# Altium PCB PCB1.PcbDoc
Units mm, origin at the board's own origin, x right, y up, seen from the top; angles counter-clockwise.
Board outline 75.82 x 34.16 mm, 2 copper layers (Top Layer, Bottom Layer); 18 components, 31 nets, 101 pads, 30 vias.
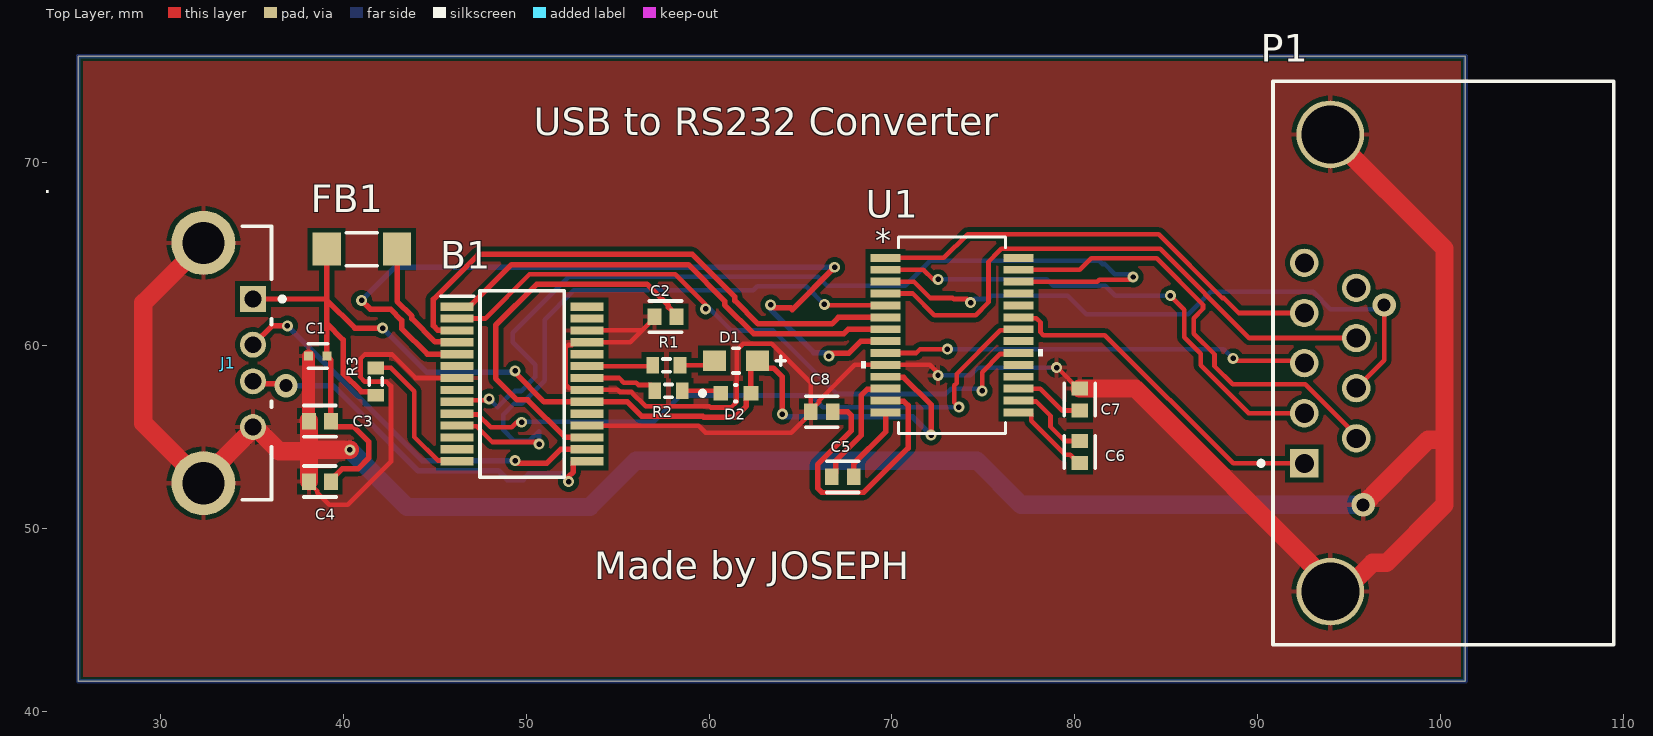
[diagram p0: Top Layer view]
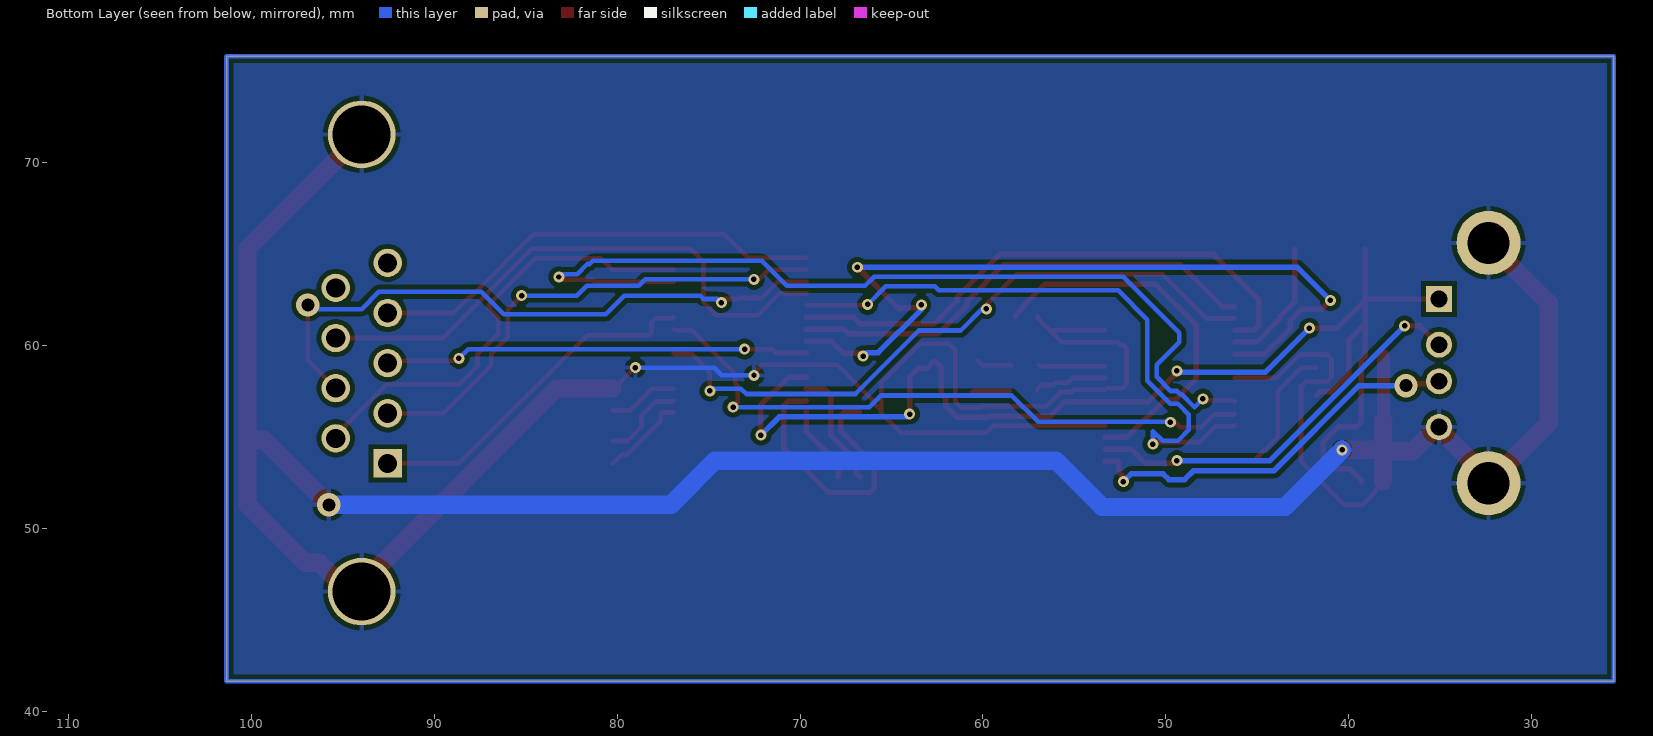
[diagram p1: Bottom Layer view, seen from below]
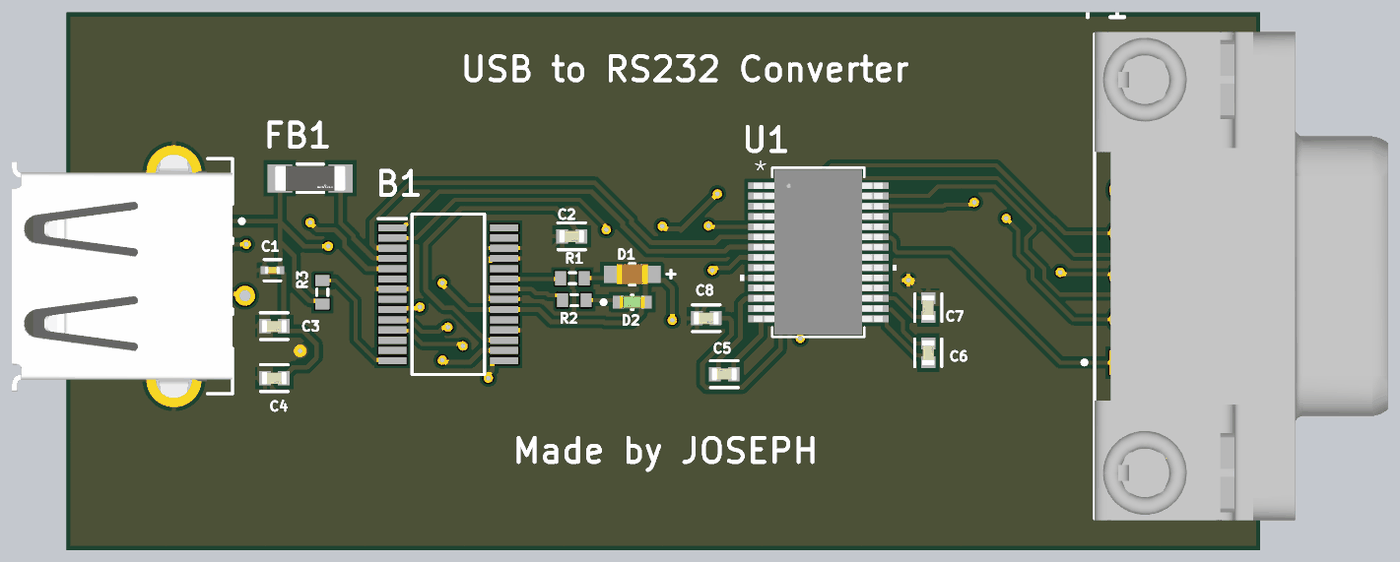
[diagram p2: 3D render of the assembled board from above, using the file's embedded part models]

## Layer stack, top to bottom
Top Solder: solder mask 0.0102, Solder Resist, Dk 3.5
Top Layer: signal copper 0.0356
Dielectric 1: dielectric 0.32, FR-4, Dk 4.8
Bottom Layer: signal copper 0.0356
Bottom Solder: solder mask 0.0102, Solder Resist, Dk 3.5

## Board outline
25.527,41.656 25.527,75.819 101.346,75.819 101.346,41.656

## Design rules (kind name [scope] priority, off if disabled: settings)
BoardOutlineClearance [All] p1: gap=0.254 ignorepadtopadclearanceinfootprint=FALSE
Clearance [All] p1: gap=0.254 ignorepadtopadclearanceinfootprint=FALSE except(0: Arc-Hole Track-Hole SMDPad-Hole THPad-Hole Via-Hole Fill-Hole Poly-Hole Region-Hole Text-Hole; 0.15: Arc-SMDPad Track-SMDPad SMDPad-SMDPad)
HoleToHoleClearance [All] p1: gap=0.15 allowstackedmicrovias=TRUE
MinimumSolderMaskSliver [All] p1: minsoldermaskwidth=0.15
PolygonConnect [All] p1: connectstyle=Relief reliefconductorwidth=0.254 reliefentries=4 polygonreliefangle="90 Angle" airgapwidth=0.254
RoutingVias [All] p1: holewidth=0.711 width=1.27 viastyle="Through Hole" minholewidth=0.711 minwidth=1.27 maxholewidth=0.711 maxwidth=1.27
SilkToSilkClearance [All] p1: silktosilkclearance=0.15
SilkToSolderMaskClearance [IsPad] p1: minsilkscreentomaskgap=0.1 clearancetoexposedcopper=TRUE
SolderMaskExpansion [All] p1: expansion=0.102 istentingtop=FALSE
Width [InNet('VCC')] p1: maxlimit=0.3 minlimit=0.2 preferedwidth=0.25
Width Width_1 [InNet('GND')] p2: maxlimit=1 minlimit=0.254 preferedwidth=0.7
26 further rules are at their usual default settings.

## Components (designator, comment, footprint, x,y, rotation, side; value= is the part's Value field where it differs from the comment)
B1 "FT232RL-REEL" SOP65P780X200-28N 49.784,57.912 r0 top
C1 "CC0402KPX7R6BB104" FP-CC0402-MFG 38.616,59.436 r180 top value="100 nF"
C2 "C0603C104M3VAC" FP-C0603C-CF-MFG 57.623,61.595 r180 top value="0.10 μF"
C3 "C0603C104M3VAC" FP-C0603C-CF-MFG 38.735,55.88 r180 top value="0.10 μF"
C4 "C0603C104M3VAC" FP-C0603C-CF-MFG 38.735,52.578 r180 top value=4.7uF
C5 "C0603C104M3VAC" FP-C0603C-CF-MFG 67.31,52.832 r0 top value=4.7uF
C6 "C0603C104M3VAC" FP-C0603C-CF-MFG 80.264,54.194 r270 top value=4.7uF
C7 "C0603C104M3VAC" FP-C0603C-CF-MFG 80.264,57.058 r90 top value=4.7uF
C8 "C0603C104M3VAC" FP-C0603C-CF-MFG 66.167,56.388 r180 top value=4.7uF
D1 "AP2012EC" FP-AP2012EC-MFG 61.468,59.182 r180 top
D2 "APT1608LZGCK" FP-APT1608LZGCK-MFG 61.468,57.404 r0 top
FB1 "BLM41PG471SN1L" FP-BLM41-0_2-a1_2-IPC_B 41.021,65.278 r0 top
J1 "292303-4" FP-292303-4-MFG 29.083,59.055 r270 top
P1 "5747840-3" TECO-5747840-3_V 93.957,59.055 r90 top
R1 "Res3" J1-0603 57.67,58.928 r0 top value=10K
R2 "Res3" J1-0603 57.785,57.531 r0 top value=10K
R3 "Res3" J1-0603 41.783,58.039 r90 top value=10K
U1 "SP213EHCA-L/TR" SSOP-28 73.279,60.579 r0 top

## Footprints (in the part's own frame and the unit in brackets; to place one, negate y for a bottom-side part, rotate by r counter-clockwise, add the part's x,y. Pads: shape width x height; smd on the part's side, far side on the other; paste and mask are expansions set on the pad)
FP-292303-4-MFG [mm]
  rect 1.42x1.42 hole 0.92 paste-1000 mask+0: 1(-3.5,5.99)
  round 1.42 hole 0.92 paste-1000 mask+0: 2(-1,5.99) 3(1,5.99) 4(3.5,5.99)
  round 3.5 hole 2.3 paste-1000 mask+0: 5(-6.57,3.28) 6(6.57,3.28)
  silkscreen extent -7.47,5.4 7.47,7.72, body extent -8.42,-7.1 8.42,7.1, height 0.25
FP-AP2012EC-MFG [mm]
  rect 1.25x1.1 smd paste+0 mask+0: 1(-1.175,0) 2(1.175,0)
  silkscreen extent -2.7,-0.67 0.18,0.67, body extent -1.9,-0.77 1.9,0.77, height 0.25
FP-APT1608LZGCK-MFG [mm]
  rect 0.8x0.8 smd paste+0 mask+0: 1(-0.825,0) 2(0.825,0)
  silkscreen extent -1.95,-0.45 0.05,0.45, body extent -1.33,-0.55 1.33,0.55, height 0.25
FP-BLM41-0_2-a1_2-IPC_B [mm]
  rect 1.554x1.806 smd paste+0 mask+0: 1(-1.926,0) 2(1.926,0)
  silkscreen extent -0.85,-0.9 0.85,0.9, body extent -2.95,-1.15 2.95,1.15, height 0.25
FP-C0603C-CF-MFG [mm]
  rect 0.75x0.9 smd paste+0 mask+0: 1(-0.6,0) 2(0.6,0)
  silkscreen extent -0.87,-0.85 0.88,0.85, body extent -1.2,-0.6 1.2,0.6, height 0.25
FP-CC0402-MFG [mm]
  rect 0.5x0.5 smd paste+0 mask+0: 1(-0.5,0) 2(0.5,0)
  silkscreen extent -0.53,-0.68 0.53,0.67, body extent -0.87,-0.48 0.87,0.48, height 0.25
J1-0603 [mm] "Chip Resistor, Body 1.6x0.8mm, IPC High Density"
  rect 0.7x0.9 smd: 1(-0.75,0) 2(0.75,0)
  silkscreen extent -0.2,-0.35 0.2,0.35, body extent -0.85,-0.48 0.85,0.48, height 0.9
SOP65P780X200-28N [mm]
  rect 1.8x0.45 smd: 1(-3.55,4.225) 2(-3.55,3.575) 3(-3.55,2.925) 4(-3.55,2.275) 5(-3.55,1.625) 6(-3.55,0.975) 7(-3.55,0.325) 8(-3.55,-0.325) 9(-3.55,-0.975) 10(-3.55,-1.625) 11(-3.55,-2.275) 12(-3.55,-2.925) 13(-3.55,-3.575) 14(-3.55,-4.225) 15(3.55,-4.225) 16(3.55,-3.575) 17(3.55,-2.925) 18(3.55,-2.275) 19(3.55,-1.625) 20(3.55,-0.975) 21(3.55,-0.325) 22(3.55,0.325) 23(3.55,0.975) 24(3.55,1.625) 25(3.55,2.275) 26(3.55,2.925) 27(3.55,3.575) 28(3.55,4.225)
  silkscreen extent -4.45,-5.1 2.3,5.1, body extent -3.9,-5.1 3.9,5.1, height 0.25
SSOP-28 [mil]
  rect 65x17 smd paste+0 mask+0: 1(-143,166.34) 2(-143,140.75) 3(-143,115.16) 4(-143,89.57) 5(-143,63.98) 6(-143,38.39) 7(-143,12.8) 8(-143,-12.8) 9(-143,-38.39) 10(-143,-63.98) 11(-143,-89.57) 12(-143,-115.16) 13(-143,-140.75) 14(-143,-166.34) 15(143,-166.34) 16(143,-140.75) 17(143,-115.16) 18(143,-89.57) 19(143,-63.98) 20(143,-38.39) 21(143,-12.8) 22(143,12.8) 23(143,38.39) 24(143,63.98) 25(143,89.57) 26(143,115.16) 27(143,140.75) 28(143,166.34)
  silkscreen extent -196,-212 196,212, body extent -161,-206 161,206, height 79
TECO-5747840-3_V [mm] "THD, 9-Leads, Body 30.81x18.62mm, Pitch 2.74mm"
  rect 1.55x1.55 hole 1.04: 1(-5.485,1.42)
  round 1.55 hole 1.04: 2(-2.745,1.42) 3(-0.005,1.42) 4(2.735,1.42) 5(5.475,1.42) 6(-4.115,-1.42) 7(-1.375,-1.42) 8(1.365,-1.42) 9(4.105,-1.42)
  round 3.7 hole 3.17: MH1(-12.495,0) MH2(12.495,0)
  silkscreen extent -15.4,-15.49 15.41,3.9, body extent -15.52,-15.48 15.52,3.12, height 12.77

## Part data
B1: "USB Bridge, USB to UART USB 2.0 UART Interface 28-SSOP", Manufacturer_Name="FTDI(Future Designs)", Datasheet Link=https://datasheet.lcsc.com/szlcsc/Future-Designs-FT232RL-REEL_C8690.pdf, Geometry.Height=2mm, Manufacturer_Part_Number=FT232RL-REEL
C1: library part CMP-03422-001115-1, "CC0402 100 nF X7R 10.00% 10 V", Capacitance="100 nF", Manufacturer=YAGEO, Package=CC0402, Temperature="-55°C to +125°C", Temperature Characteristic=X7R, Temperature Coefficient=30ppm/°C, Temperature Range High=+125°C, Temperature Range Low=-55°C, Tolerance=0.1, Voltage Rating="10 V", Automotive=No, Automotive Grade=NA, Category=Cap, ComponentLink2Description=Datasheet, ComponentLink2URL=http://www.yageo.com/documents/recent/UPY-GP_NP0_16V-to-50V_16.pdf, Device Class L1="Passive Components", Device Class L2=Capacitors, Device Class L3="Ceramic Capacitors", Footprint Url=http://www.yageo.com/exep/pages/download/literatures/UPY-C_GEN_24.pdf, Height=0.55mm, Ipc Land Pattern Name=CAPC10050X50, Lead Free=Yes, Manufacturer Part Number=CC0402KPX7R6BB104, Material=Ceramic, Mouser Description="0402 0.1 uF 10 V ±10% Tolerance X7R SMT Multilayer Ceramic Capacitor", Octopart=https://octopart.com/cc0402kpx7r6bb104-yageo-12885101, RoHS=TRUE
C2 C3 C4 C5 C6 C7 C8: library part CMP-03020-028681-2, "C0603 0.10 μF Y5V 30ppm/°C 20.00% 25 V", Capacitance="0.10 μF", Manufacturer=KEMET, Package=C0603C-CF, Temperature="-55°C to +125°C", Temperature Characteristic=Y5V, Temperature Coefficient=30ppm/°C, Temperature Range High=+125°C, Temperature Range Low=-55°C, Tolerance=0.2, Voltage Rating="25 V", Automotive=Yes, Automotive Grade="Grade 1", Category=Cap, ComponentLink2Description=Datasheet, ComponentLink2URL=https://api.kemet.com/component-edge/download/datasheet/C0603C100J5GACAUTO.pdf, Device Class L1="Passive Components", Device Class L2=Capacitors, Device Class L3="Ceramic Capacitors", Height=0.87mm, Lead Free=Yes, Manufacturer Part Number=C0603C104M3VAC, Material=Ceramic, Mouser Description="Cap .10UF 25V Ceramic Y5V 0603", Octopart=https://octopart.com/c0603c104m3vac-kemet-1325404, RoHS=TRUE
D1: library part CMP-44529-000070-1, "LED RED CLEAR SMD", Case Code (Imperial)=0805, Case Code (Metric)=2012, Color=Red, Forward Current=20mA, Forward Voltage=2V, Max Operating Temperature=85°C, Min Operating Temperature=-40°C, Package Quantity=2000, Case/Package=0805, Dominant Wavelength=625nm, Height=1.1mm, Illumination Color=Red, Lead Free="Lead Free", Length=2mm, Lens Style=Clear, Luminous Intensity=15mcd, Mount="Surface Mount", Packaging="Tape and Reel", RoHS Compliant=Yes, Test Current=20mA, Viewing Angle=120°, Wavelength=627nm, Width=1.25mm
D2: library part CMP-44529-000040-1, "LED GREEN CLEAR 2SMD", Case Code (Imperial)=0603, Case Code (Metric)=1608, Color=Green, Forward Voltage=2.65V, Lens Color=Colorless, Test Current=2mA, Case/Package=0603, Dominant Wavelength=525nm, Height=0.75mm, Length=1.6mm, Lens Transparency=Clear, Luminous Intensity=50mcd, Mount="Surface Mount", Packaging="Cut Tape", Viewing Angle=120°, Width=0.8mm
FB1: library part CMP-0686-00760-3, "Ferrite Bead, 1806, 470Ω @ 100MHz, 25%, 0.05Ω, 2A", Case Code (Imperial)=1806, Case Code (Metric)=4516, Current Rating=2A, DC Resistance (DCR)=50mR, Frequency=100MHz, Max Operating Temperature=125°C, Min Operating Temperature=-55°C, Package Quantity=1, Tolerance=25%, Case/Package=1806, Core Material=Ferrite, DC Current=2A, DC Resistance-Max=50mR, Depth=1.6mm, Height=1.6mm, Impedance=470R, Lead Free="Lead Free", Length=4.5mm, Material=Steel, Max Current Rating=2A, Max DC Current=2A, Military Standard=Not, Number of Circuits=1, Number of Lines=1, Number of Pins=2, Packaging="Tape and Reel", Radiation Hardening=No, RoHS Compliant=Yes, Series=BLM41P, Shielding=Unshielded, Termination=SMD/SMT, Test Frequency=100MHz, Width=1.6mm
J1: library part CMP-03360-000007-1, "CONN RCPT USB2.0 TYPEA 4POS R/A", Current Rating=1A, Manufacturer="TE Connectivity", Temperature="-55°C to +85°C", Temperature Range High=+85°C, Temperature Range Low=-55°C, Voltage Rating=30V, Automotive=No, Category=Conn, ComponentLink2Description=Datasheet, ComponentLink2URL=https://www.te.com/usa-en/product-292303-4.html?te_bu=Cor&te_type=other&te_campaign=oct_glo_cor-oct-global-oth-prtnr-fy19-oct-octo-buy-bom_sma-298_2&elqCampaignId=35216, Conn Orientation="Right Angle", Contact Material=Gold,Nickel, Device Class L1=Connectors, Device Class L2="USB Connectors", Device Class L3=unset, Digikey Description="CONN RCPT USB2.0 TYPEA 4POS R/A", Is Female=yes, Lead Free=Yes, Manufacturer Part Number=292303-4, Mouser Description="Modular Connectors / Ethernet Connectors USB A R/A RCPT T/H", Number of Contacts=4, Octopart=https://octopart.com/292303-4-te+connectivity-39545343, Package=292303-4, RoHS=TRUE, Shielding=true, USB Standard="USB 2.0"
P1: library part CMP-2000-05647-1, "Male D-Sub Connector, Pitch 2.74 mm, 2 Row, 9 Position, Height 12.93 mm, Tail Length 3.17 mm, -55 to 105 degC, RoHS, Tray", Color=Black, Current Rating=6A, Manufacturer="TE Connectivity", Operating Temperature=-55°C~105°C, Package Description="Male D-Sub Connector, Pitch 2.74 mm, 2 Row, 9 Position, Height 12.93 mm, Tail Length 3.17 mm", Standard Package=130, Voltage Rating=125V, 3D Model=5747840-3.pdf, Catalog Drawings=AMPD-SubMale.318, Category=Connectors,Interconnects, Connector Style=D-Sub, Connector Type=Plug,MalePins, Contact Finish=Gold, Contact Finish Thickness=Flash, Contact Type=Signal, Datasheet URL=http://www.te.com/commerce/DocumentDelivery/DDEController?Action=srchrtrv&DocNm=5747840&DocType=Customer+Drawing&DocLang=English, Datasheet Version="Rev. D, 01/2013", Dynamic Catalog=AMPLIMITEHD-20Series, Family=D-SubConnectors, Featured Product=AMPLIMITED-SubminiatureConnectors, Features=BoardLock,GroundStrap,GroundingIndents, Flange Feature=Housing/Shell(4-40), Manufacturer URL=http://www.te.com/, Mating Products="5-747905-7-ND / -CONND-SUBRCPT9POSVERTSLD / 5-787355-1-ND / -CONNRCPT9POSVERTSOLDERCUP / 5746861-4-ND / -CONNRECEPT9POSGOLDIDC / A32510-ND / -CONND-SUBRCPT9POSSLDCUPAU / AFL09B-ND / -CONND-SUBRECEPT9POS30GOLD / A31975-ND / -CONND-SUBRECEPT9P22-26AWGAU / A31974-ND / -CONND-SUBRECEPT9P20-22AWGAU / A31973-ND / -CONND-SUBRECEPT9P26-30AWGAU / A31931-ND / -CONND-SUBRCPT9POS22-26AWGAU", Mounting Technology=ThroughHole, Mounting Type=ThroughHole,RightAngle, Number of Positions=9, Number of Rows=2, Other Names=A32091, Package Reference=5747840-3, Product Training Modules=AMPLIMITED-SubConnectors, RoHS Information=5747840-3StatementofCompliance, Series=AMPLIMITEHD-20, Shell Material, Finish=Steel,TinPlated, Shell Size, Connector Layout=1(DE,E), Termination=Solder
R1 R2 R3: "Resistor", LatestRevisionDate=29-May-2009, LatestRevisionNote="IPC-7351 Footprint Added.", PackageDescription="Chip Resistor", PackageReference=J1-0603, Published=8-Jun-2000, Publisher="Altium Limited"
U1: library part SP213EHCA-LTR, "No Description Available", Manufacturer_Name=MaxLinear, Copyright="Copyright (C) 2025 Ultra Librarian. All rights reserved.", Manufacturer_Part_Number=SP213EHCA-L/TR, RefDes=RefDes, Type=Type

## Via types
v1: diameter 0.6, hole 0.3, Top Layer to Bottom Layer, 27 vias
v2: diameter 1.27, hole 0.711, Top Layer to Bottom Layer, 3 vias

## Nets (pads, with @x,y where several pads share a name; then routed paths per layer and width w, separated by ;. In a path a pad name is that pad's centre, name@x,y a point inside that pad or via, vN(x,y) a via of type N, cw(c..) or ccw(c..) an arc to the next point about the centre after c; other vN are vias at no path point)
GND: B1.7 B1.18 B1.21 B1.25 B1.26 C1.2 C2.2 C3.2 C4.2 C7.2 C8.2 J1.4 J1.5 J1.6 P1.MH1 P1.MH2 U1.10 | length 225.8
  Top Layer w0.254: C4.2 38.135,52.503 38.579,52.059 38.579,51.97 39.241,51.308 40.259,51.308 42.614,53.663 42.614,57.797 42.372,58.039 41.194,58.039 40.952,58.281 40.952,59.297 41.175,59.52 42.677,59.52 43.96,58.237 B1.7 ; B1.18 53.345,55.626 59.429,55.626 59.81,55.245 64.499,55.245 65.567,56.313 C8.2 C8.2@65.567,56.463 ; B1.26 56.34,60.837 ; C2.2 57.023,61.52 56.34,60.837 ; v1(72.516,58.381) 72.55,58.415 72.55,58.477 72.073,58.954 U1.10 67.969,58.954 66.011,56.996 66.011,56.907 C8.2@65.567,56.463 ; v1(78.994,58.801) 79.046,58.801 80.189,57.658 C7.2 ; 56.34,60.837 55.69,60.187 B1.25 52.659,60.187 52.511,60.039 52.319,60.039 52.157,59.877 52.157,57.897 52.369,57.685 53.236,57.685 B1.21 55.016,57.587 55.135,57.468 55.759,57.468 56.539,56.688 60.02,56.688 60.085,56.623 61.201,56.623 61.512,56.934 61.512,59.765 61.86,60.113 63.426,60.113 65.567,57.972 C8.2@65.567,56.463
  Top Layer w0.7: C3.2@38.116,55.899 C1.2
  Top Layer w1: J1.5 29.083,62.345 29.083,55.765 J1.6 32.363,52.731 35.073,55.441 J1.4 35.187,55.555 36.513,54.229 38.135,54.229 ; C3.2@38.116,55.899 C3.2 38.135,54.229 ; C4.2 38.135,54.229 ; v1(40.374,54.309) 38.215,54.309 38.135,54.229 ; C7.2 83.312,57.658 93.957,47.013 P1.MH1 94.688,46.56 96.261,48.133 97.028,48.133 100.203,51.308 100.203,54.864 ; P1.MH2 100.203,65.304 100.203,54.864 ; v2(95.758,51.308) 99.314,54.864 100.203,54.864
  Bottom Layer w0.254: v1(72.516,58.381) 74.273,58.381 74.694,58.801 v1(78.994,58.801)
  Bottom Layer w1: v1(40.374,54.309) 43.494,51.189 53.475,51.189 56.007,53.721 74.639,53.721 77.052,51.308 v2(95.758,51.308)
NetB1_1: B1.1 U1.7 | length 26.2
  Top Layer w0.3: B1.1 46.909,62.137 49.207,64.435 58.866,64.435 60.856,62.445 60.856,62.24 62.452,60.644 67.36,60.644 67.62,60.904 U1.7
NetB1_2: B1.2 U1.20 | length 36.1
  Top Layer w0.254: B1.2 47.771,61.487 50.188,63.904 58.143,63.904 59.817,62.23 v1(59.817,62.014) ; v1(74.93,57.531) 74.93,58.553 75.928,59.551 76.858,59.551 U1.20
  Bottom Layer w0.254: v1(59.817,62.014) 60.033,62.014 61.214,60.833 63.5,60.833 66.968,57.365 72.946,57.365 73.239,57.658 74.803,57.658 v1(74.93,57.531)
NetB1_3: B1.3 U1.6 | length 30.4
  Top Layer w0.3: B1.3 46.213,60.858 45.167,60.858 44.93,61.095 44.93,62.529 47.39,64.989 59.095,64.989 61.41,62.674 61.41,62.469 62.681,61.198 66.718,61.198 67.074,61.554 U1.6
NetB1_4: B1.4 FB1.2 | length 7.1
  Top Layer w0.3: FB1.2 42.947,62.43 43.757,61.62 43.757,61.484 45.033,60.208 46.213,60.208 B1.4
NetB1_5: B1.5 U1.8 | length 45.8
  Top Layer w0.3: v1(41.008,62.474) 41.483,61.999 42.594,61.999 43.203,61.39 43.203,60.937 44.603,59.537 B1.5 ; v1(63.373,62.237) 63.535,62.075 64.458,62.075 64.557,61.976 v1(66.871,64.29) ; v1(66.548,59.436) 66.699,59.587 67.633,59.587 68.3,60.254 U1.8
  Bottom Layer w0.3: v1(41.008,62.474) 42.834,64.3 66.86,64.3 v1(66.871,64.29) ; v1(63.373,62.237) 63.373,61.976 65.727,59.622 66.362,59.622 v1(66.548,59.436)
NetB1_9: B1.9 U1.26 | length 50.8
  Top Layer w0.254: B1.9 46.315,57.018 47.902,57.018 v1(47.983,57.1) ; U1.26 81.226,63.504 81.333,63.61 83.04,63.61 v1(83.187,63.757)
  Bottom Layer w0.254: v1(47.983,57.1) 48.43,56.653 48.442,56.653 49.131,57.342 49.214,57.342 49.395,57.523 49.734,57.523 50.504,58.293 50.504,58.97 49.276,60.198 49.276,60.706 52.339,63.769 65.955,63.769 66.45,63.274 70.727,63.274 72.096,64.643 81.315,64.643 81.489,64.47 81.616,64.47 82.171,63.915 83.029,63.915 v1(83.187,63.757)
NetB1_10: B1.10 U1.22 | length 35.1
  Top Layer w0.254: B1.10 46.278,56.243 47.36,56.243 48.061,55.542 49.212,55.542 49.487,55.818 v1(49.762,55.818) ; v1(73.66,56.642) 73.406,56.896 73.406,57.834 73.532,57.96 73.532,58.455 75.928,60.851 76.858,60.851 U1.22
  Bottom Layer w0.254: v1(49.762,55.818) 49.781,55.837 56.986,55.837 58.426,57.277 65.588,57.277 66.223,56.642 v1(73.66,56.642)
NetB1_11: B1.11 U1.5 | length 35.1
  Top Layer w0.254: B1.11 46.278,55.593 47.292,55.593 48.148,54.737 50.598,54.737 v1(50.71,54.624) ; v1(66.306,62.256) 66.358,62.204 U1.5
  Bottom Layer w0.254: v1(50.71,54.624) 50.71,55.329 50.183,54.802 49.341,54.802 48.746,55.397 48.746,56.239 49.341,56.834 49.763,56.834 51.012,58.083 51.012,61.426 52.616,63.03 62.423,63.03 62.646,63.253 65.309,63.253 v1(66.306,62.256)
NetB1_14: B1.14 R3.2 | length 8
  Top Layer w0.254: R3.2 42.614,58.789 43.895,57.508 43.895,55.012 45.176,53.731 46.19,53.731 B1.14
NetB1_15: B1.15 J1.3 | length 21.7
  Top Layer w0.3: J1.3 35.193,57.935 36.757,57.935 v2(36.877,57.815) ; v1(52.324,52.578) 52.324,52.84 52.584,53.1 52.584,53.612 52.659,53.687 B1.15
  Bottom Layer w0.3: v2(36.877,57.815) 39.446,57.815 44.094,53.167 48.488,53.167 48.973,52.682 49.833,52.682 50.154,53.002 51.9,53.002 v1(52.324,52.578)
NetB1_16: B1.16 J1.2 | length 22.1
  Top Layer w0.3: J1.2 36.105,61.087 v1(36.957,61.087) ; v1(49.403,53.721) 49.539,53.585 51.141,53.585 51.892,54.337 B1.16
  Bottom Layer w0.3: v1(36.957,61.087) 44.323,53.721 v1(49.403,53.721)
NetB1_17: B1.17 C2.1 | length 20.9
  Top Layer w0.3: B1.17 53.313,55.008 52.125,55.008 50.087,57.046 49.506,57.046 48.341,58.211 48.341,61.119 50.595,63.373 56.606,63.373 57.777,62.202 57.777,62.116 58.223,61.67 C2.1
NetB1_22: B1.22 R2.1 | length 4.1
  Top Layer w0.254: B1.22 55.084,58.237 55.346,57.976 56.018,57.976 56.14,57.854 56.812,57.854 57.035,57.631 R2.1
NetB1_23: B1.23 R1.1 | length 3.6
  Top Layer w0.254: B1.23 56.879,58.887 R1.1
NetC5_1: C5.1 U1.12 | length 6.6
  Top Layer w0.3: C5.1 66.935,53.057 66.935,53.727 68.326,55.118 68.326,57.296 68.654,57.624 69.617,57.624 U1.12
NetC5_2: C5.2 U1.14 | length 4.2
  Top Layer w0.3: C5.2 67.91,53.559 69.647,55.296 U1.14
NetC6_1: C6.1 U1.16 | length 4.6
  Top Layer w0.254: U1.16 76.964,56.951 77.895,56.951 78.664,56.182 78.664,55.563 79.433,54.794 C6.1
NetC6_2: C6.2 U1.15 | length 4.7
  Top Layer w0.254: U1.15 77.521,56.354 77.61,56.265 77.61,55.899 79.471,54.038 79.745,54.038 80.189,53.594 C6.2
NetC7_1: C7.1 U1.17 | length 3.9
  Top Layer w0.254: U1.17 76.915,57.658 78.105,57.658 79.305,56.458 C7.1
NetC8_1: C8.1 U1.13 | length 15.6
  Top Layer w0.3: C8.1 67.592,56.388 67.768,56.212 67.768,55.343 65.931,53.506 65.931,52.215 66.168,51.978 68.452,51.978 70.876,54.402 70.876,56.737 70.64,56.974 69.677,56.974 U1.13
NetD1_2: D1.2 R1.2 | length 2
  Top Layer w0.254: R1.2 60.039,58.928 D1.2
NetD2_1: D2.1 R2.2 | length 2.2
  Top Layer w0.254: R2.2 60.516,57.531 D2.1
NetP1_1: P1.1 U1.23 | length 19.3
  Top Layer w0.254: U1.23 76.964,61.501 77.895,61.501 78.118,61.278 78.118,60.728 78.266,60.579 81.637,60.579 88.646,53.57 P1.1
NetP1_2: P1.2 U1.2 | length 27.4
  Top Layer w0.254: U1.2 71.715,64.154 72.242,63.627 v1(72.517,63.627) ; v1(85.217,62.738) 85.979,61.976 85.979,60.456 86.872,59.563 86.872,58.928 89.49,56.31 P1.2
  Bottom Layer w0.254: v1(72.517,63.627) 78.469,63.627 78.815,63.281 81.666,63.281 82.209,62.738 v1(85.217,62.738)
NetP1_3: P1.3 U1.9 | length 23.3
  Top Layer w0.254: U1.9 71.317,59.604 71.53,59.817 v1(73.025,59.817) ; v1(88.646,59.309) 88.775,59.18 92.408,59.18 P1.3
  Bottom Layer w0.254: v1(73.025,59.817) 88.138,59.817 v1(88.646,59.309)
NetP1_4: P1.4 U1.1 | length 25.2
  Top Layer w0.254: U1.1 72.838,64.804 74.132,66.098 84.573,66.098 88.06,62.611 88.134,62.611 88.955,61.79 P1.4
NetP1_6: P1.6 U1.27 | length 24.9
  Top Layer w0.254: U1.27 80.267,64.154 80.885,64.773 84.461,64.773 87.001,62.233 87.001,62.022 86.487,61.508 86.487,60.666 87.63,59.523 87.63,58.888 88.624,57.894 92.588,57.894 95.377,55.105 P1.6
NetP1_7: P1.7 U1.3 | length 34.5
  Top Layer w0.254: U1.3 71.203,63.504 72.096,62.611 73.317,62.611 73.377,62.551 74.101,62.551 v1(74.295,62.357) ; P1.7 96.901,59.204 v2(96.901,62.23)
  Bottom Layer w0.254: v1(74.295,62.357) 74.489,62.551 75.251,62.551 75.438,62.738 79.596,62.738 80.612,61.722 86.202,61.722 87.426,62.946 93.016,62.946 93.958,62.004 96.4,62.004 96.626,62.23 v2(96.901,62.23)
NetP1_8: P1.8 U1.4 | length 31
  Top Layer w0.254: U1.4 71.135,62.854 72.313,61.676 74.577,61.676 75.274,62.373 75.274,64.6 75.809,65.135 75.971,65.297 84.655,65.297 89.532,60.42 P1.8
VCC: B1.20 C1.1 C3.1 C4.1 D1.1 D2.2 FB1.1 J1.1 R3.1 U1.11 | length 70.9
  Top Layer w0.3: J1.1 39.045,62.555 39.095,62.505 ; FB1.1 39.095,62.505 ; C4.1 39.335,52.653 39.952,53.27 40.804,53.27 41.413,53.878 41.413,54.739 40.572,55.58 39.56,55.58 39.335,55.805 39.335,59.217 C1.1 39.116,60.579 39.095,60.6 39.095,61.235 ; R3.1 41.583,57.489 40.993,57.489 40.005,58.477 40.005,60.325 39.095,61.235 ; v1(42.164,60.96) 40.64,60.96 39.095,62.505 ; v1(49.4,58.626) 49.4,58.527 50.99,56.937 55.539,56.937 56.319,56.157 59.648,56.157 59.713,56.092 61.421,56.092 62.043,56.714 62.043,57.154 D2.2 62.293,58.832 D1.1 63.043,58.782 63.519,58.782 64.008,58.293 v1(64.008,56.261) ; U1.11 69.677,58.274 70.64,58.274 72.136,56.778 v1(72.136,55.11) ; 39.095,61.235 39.095,62.505
  Bottom Layer w0.3: v1(42.164,60.96) 44.577,58.547 49.321,58.547 v1(49.4,58.626) ; v1(64.008,56.261) 64.158,56.111 71.135,56.111 v1(72.136,55.11)
pads on no net: B1.6 B1.8 B1.12 B1.13 B1.19 B1.24 B1.27 B1.28 P1.5 P1.9 U1.18 U1.19 U1.21 U1.24 U1.25 U1.28
copper on no net: | length 220
  Bottom Layer w0.254: 25.527,41.656 101.346,41.656 101.346,75.819 25.527,75.819 25.527,41.656

## Polygon pours and split planes (outlines as drawn)
GND on Bottom Layer "GND_L02_P000" (solid, pour order 0): 25.527,75.819 25.527,41.656 101.346,41.656 101.346,75.819
GND on Top Layer "GND_L01_P001" (solid, pour order 1): 25.527,75.819 25.527,41.656 101.346,41.656 101.346,75.819

## Silkscreen, mask and mechanical layers (free items; w line width, h text height)
Top Overlay:
  text "USB to RS232 Converter" at 50.419,71.501 h1.52
  text "Made by JOSEPH" at 53.721,47.244 h1.52

## Text inside footprints (layer, text, board x,y; h text height)
U1: Top Overlay "*" at 69.075,65.109 h1.27; Top 3D Body "*" at 70.549,64.478 h1.27